# Altium PCB AtMega8-32 Programming Board.PcbDoc
Units mm, origin at the board's own origin, x right, y up, seen from the top; angles counter-clockwise.
Board outline 152.4 x 101.6 mm, 2 copper layers (Top Layer, Bottom Layer); 25 components, 37 nets, 188 pads, 0 vias.
Unrouted connection lines stored in the file: 34.
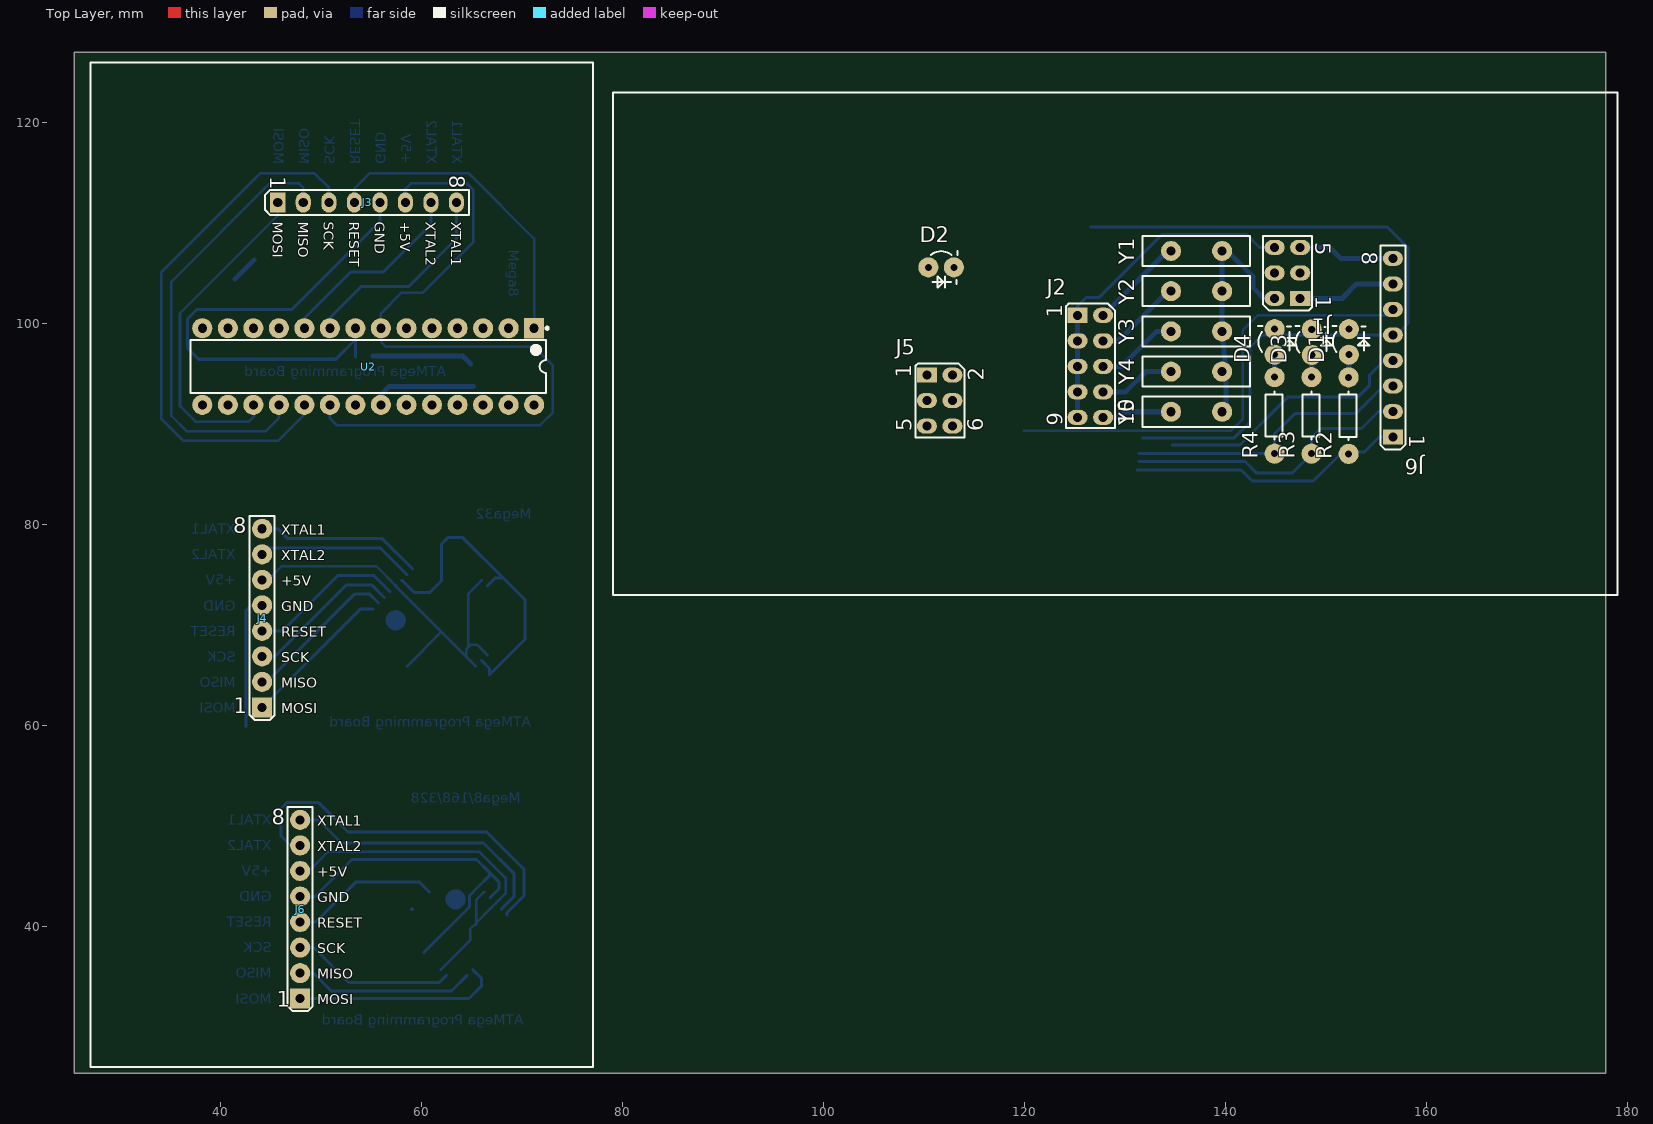
[diagram p0: Top Layer view]
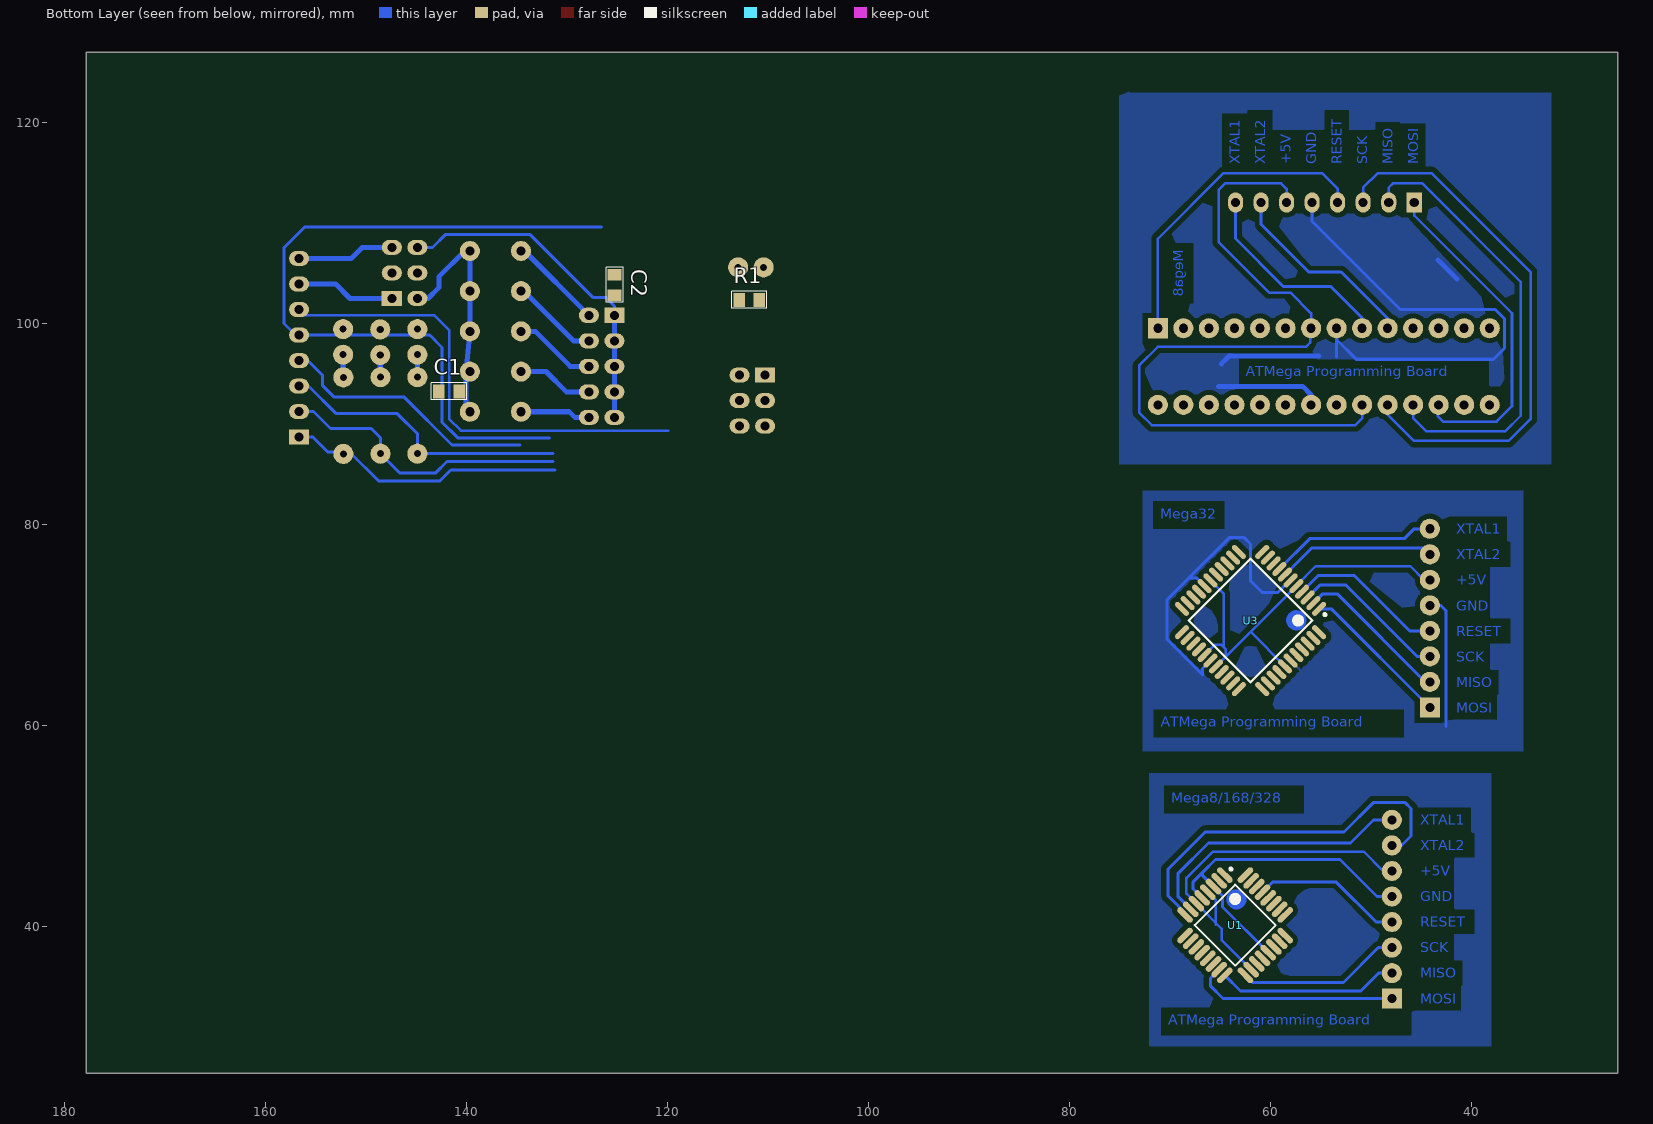
[diagram p1: Bottom Layer view, seen from below]
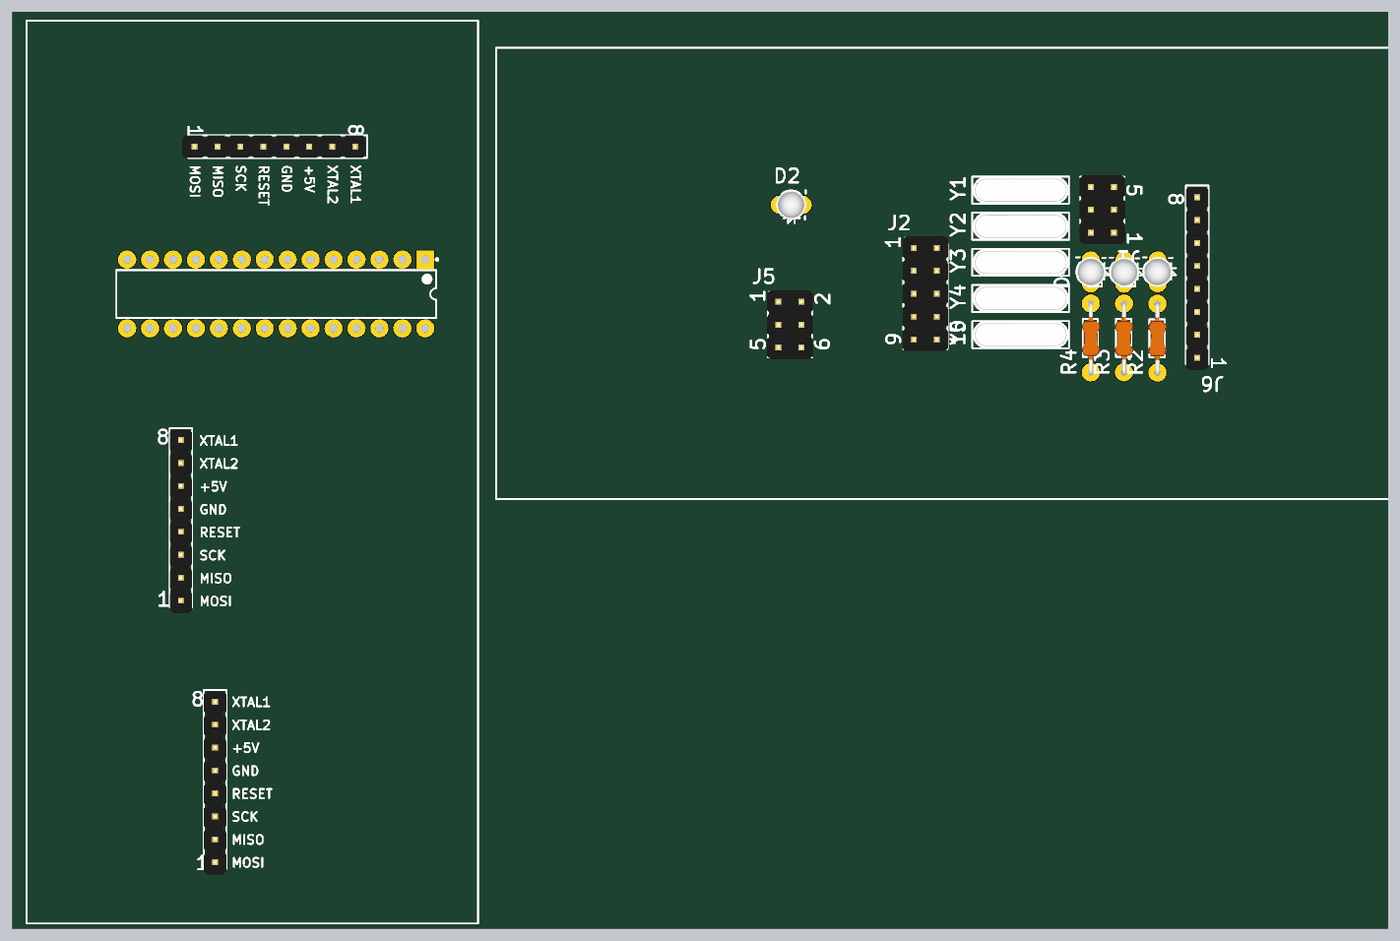
[diagram p2: 3D render of the assembled board from above, using the file's embedded part models]
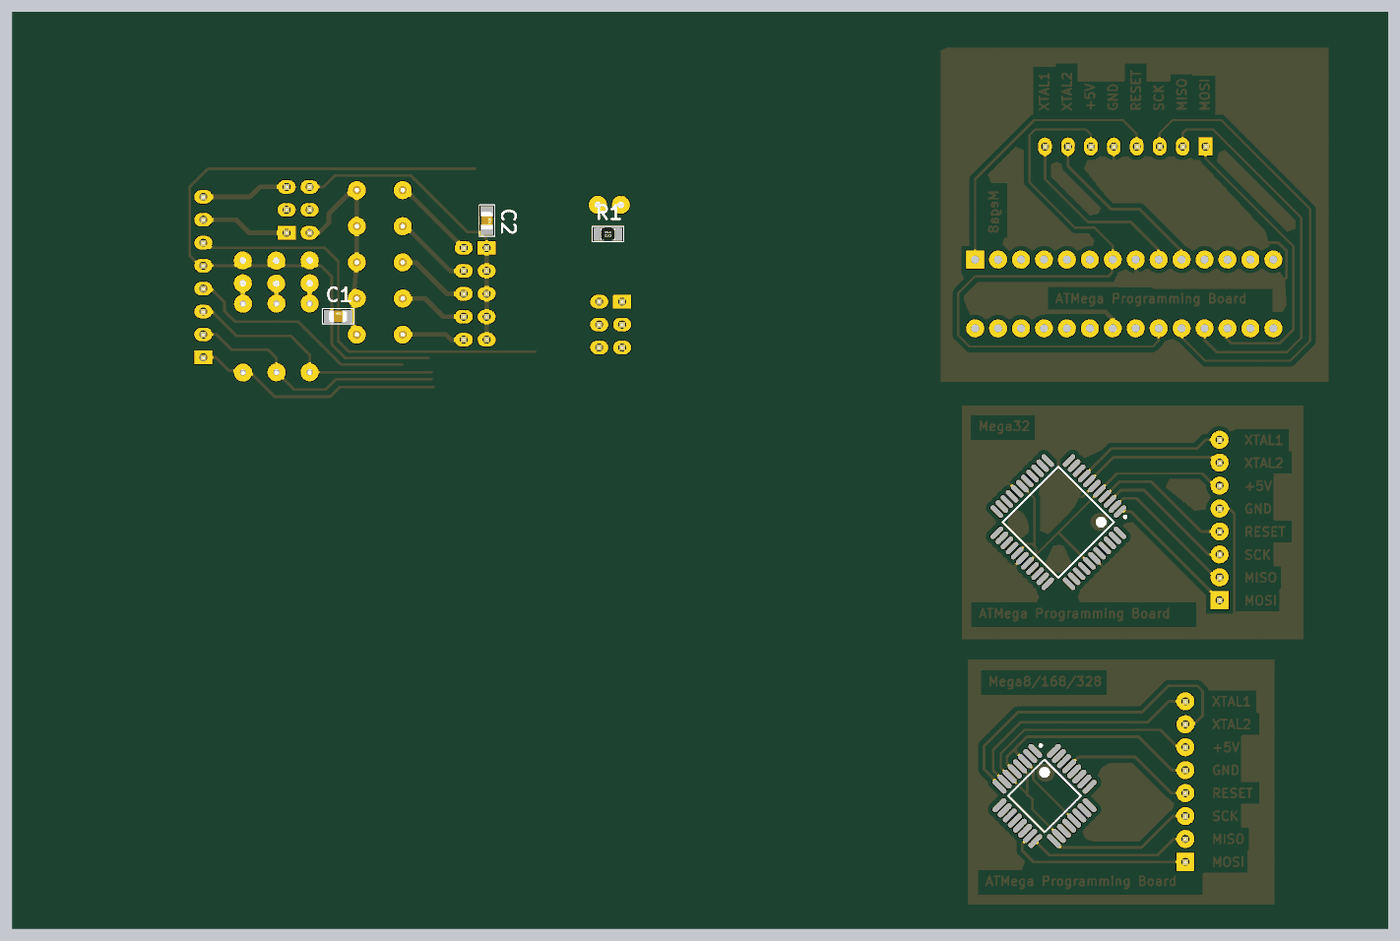
[diagram p3: 3D render of the assembled board from below, using the file's embedded part models]

## Layer stack, top to bottom
Top Solder: solder mask 0.0102, Solder Resist, Dk 3.5
Top Layer: signal copper 0.0356
Dielectric 1: dielectric 0.32, FR-4, Dk 4.8
Bottom Layer: signal copper 0.0356
Bottom Solder: solder mask 0.0102, Solder Resist, Dk 3.5

## Board outline
25.4,25.4 177.8,25.4 177.8,127 25.4,127

## Design rules (kind name [scope] priority, off if disabled: settings)
Clearance PolgonClearence [InPolygon] p1: gap=0.5
Clearance [All] p2: gap=0.2
PlaneConnect [All] p1: planeconnectstyle=Relief reliefexpansion=0.508 reliefentries=4 reliefconductorwidth=5 reliefairgap=0.5
PolygonConnect [All] p1: connectstyle=Relief reliefconductorwidth=0.3 reliefentries=4 polygonreliefangle="90 Angle" airgapwidth=0.5
RoutingVias [All] p1: holewidth=0.711 width=1.27 viastyle="Through Hole" minholewidth=0.711 minwidth=1.27 maxholewidth=0.711 maxwidth=1.27
SolderMaskExpansion [All] p1: expansion=0.102
Width [All] p1: maxlimit=1 minlimit=0.2 preferedwidth=0.3
28 further rules are at their usual default settings.

## Components (designator, comment, footprint, x,y, rotation, side; value= is the part's Value field where it differs from the comment)
C1 "22pF" "SMD 0805 (2012)" 142.725,93.225 r180 bottom
C2 "22pF" "SMD 0805 (2012)" 125.25,104.875 r270 bottom
D1 "FYL-3014GD" "LED Round 3mm Green" 152.25,96.9 r90 top
D2 "FYL-3014GD" "LED Round 3mm Green" 110.4,105.6 r0 top
D3 "FYL-3014GD" "LED Round 3mm Green" 148.55,96.875 r90 top
D4 "FYL-3014GD" "LED Round 3mm Green" 144.85,96.9 r90 top
J1 "jumper" "LINE 2.54 x 6D (2 x 3)" 147.4,102.5 r180 top
J2 "XTAL Connector" "LINE 2.54 x 10D (2 x 5)" 125.25,100.825 r0 top
J3 "PLS-8" "Line 2.54 x 8"#1 45.65,112.05 r90 top
J4 "PLS-8" "Line 2.54 x 8"#2 44.094,61.8 r180 top
J5 "ISP6" "LINE 2.54 x 6D (2 x 3)" 110.25,94.875 r0 top
J6 "PLS-8" "Line 2.54 x 8"#1 156.625,88.7 r180 top
J6 "PLS-8" "Line 2.54 x 8"#2 47.875,32.825 r180 top
R1 "2.2k Om" "SMD 0805 (2012)" 112.85,102.325 r180 bottom
R2 "2.2k Om" "Res p7.62 (4p) 0.25w" 152.225,87.025 r90 top
R3 "2.2k Om" "Res p7.62 (4p) 0.25w" 148.525,87.05 r90 top
R4 "2.2k Om" "Res p7.62 (4p) 0.25w" 144.85,87.05 r90 top
U1 "ATmega8A-AU" 32A_M 63.475,40.125 r225 bottom
U2 "ATmega8A-PU" 28P3 54.65,95.725 r270 top
U3 "ATmega32A-AU" 44A_N 61.944,70.45 r315 bottom
Y1 "8 MHz" "XTAL - 2" 139.625,107.225 r180 top
Y2 "12 MHz" "XTAL - 2" 139.625,103.225 r180 top
Y3 "16 MHz" "XTAL - 2" 139.625,99.225 r180 top
Y4 "12 MHz" "XTAL - 2" 139.625,95.225 r180 top
Y5 "12 MHz" "XTAL - 2" 139.625,91.225 r180 top

## Footprints (in the part's own frame and the unit in brackets; to place one, negate y for a bottom-side part, rotate by r counter-clockwise, add the part's x,y. Pads: shape width x height; smd on the part's side, far side on the other; paste and mask are expansions set on the pad)
28P3 [mm] "DIP, 28-Leads, Row Spacing 7.62mm, Pitch 2.54mm, Body 34.67x7.3mm"
  rect 2x2 hole 0.9: 1(-3.81,16.51)
  round 2 hole 0.9: 2(-3.81,13.97) 3(-3.81,11.43) 4(-3.81,8.89) 5(-3.81,6.35) 6(-3.81,3.81) 7(-3.81,1.27) 8(-3.81,-1.27) 9(-3.81,-3.81) 10(-3.81,-6.35) 11(-3.81,-8.89) 12(-3.81,-11.43) 13(-3.81,-13.97) 14(-3.81,-16.51) 15(3.81,-16.51) 16(3.81,-13.97) 17(3.81,-11.43) 18(3.81,-8.89) 19(3.81,-6.35) 20(3.81,-3.81) 21(3.81,-1.27) 22(3.81,1.27) 23(3.81,3.81) 24(3.81,6.35) 25(3.81,8.89) 26(3.81,11.43) 27(3.81,13.97) 28(3.81,16.51)
  silkscreen extent -3.93,-17.7 2.65,17.94, body extent -3.6,-17.65 3.6,17.65, height 4.58
32A_M [mm] "Thin QFP, 32-Leads, Body 7x7mm, Pitch 0.8mm, IPC Low Density"
  oval 1.95x0.6 smd: 1(-4.25,2.8) 2(-4.25,2) 3(-4.25,1.2) 4(-4.25,0.4) 5(-4.25,-0.4) 6(-4.25,-1.2) 7(-4.25,-2) 8(-4.25,-2.8) 17(4.25,-2.8) 18(4.25,-2) 19(4.25,-1.2) 20(4.25,-0.4) 21(4.25,0.4) 22(4.25,1.2) 23(4.25,2) 24(4.25,2.8)
  oval 0.6x1.95 smd: 9(-2.8,-4.25) 10(-2,-4.25) 11(-1.2,-4.25) 12(-0.4,-4.25) 13(0.4,-4.25) 14(1.2,-4.25) 15(2,-4.25) 16(2.8,-4.25) 25(2.8,4.25) 26(2,4.25) 27(1.2,4.25) 28(0.4,4.25) 29(-0.4,4.25) 30(-1.2,4.25) 31(-2,4.25) 32(-2.8,4.25)
  silkscreen extent -4.37,-2.85 2.85,3.77, body extent -3.5,-3.5 3.5,3.5, height 1.2
44A_N [mm] "Thin QFP, 44-Leads, Body 10x10mm, Pitch 0.8mm, IPC Medium Density"
  oval 1.75x0.55 smd: 1(-5.65,4) 2(-5.65,3.2) 3(-5.65,2.4) 4(-5.65,1.6) 5(-5.65,0.8) 6(-5.65,0) 7(-5.65,-0.8) 8(-5.65,-1.6) 9(-5.65,-2.4) 10(-5.65,-3.2) 11(-5.65,-4) 23(5.65,-4) 24(5.65,-3.2) 25(5.65,-2.4) 26(5.65,-1.6) 27(5.65,-0.8) 28(5.65,0) 29(5.65,0.8) 30(5.65,1.6) 31(5.65,2.4) 32(5.65,3.2) 33(5.65,4)
  oval 0.55x1.75 smd: 12(-4,-5.65) 13(-3.2,-5.65) 14(-2.4,-5.65) 15(-1.6,-5.65) 16(-0.8,-5.65) 17(0,-5.65) 18(0.8,-5.65) 19(1.6,-5.65) 20(2.4,-5.65) 21(3.2,-5.65) 22(4,-5.65) 34(4,5.65) 35(3.2,5.65) 36(2.4,5.65) 37(1.6,5.65) 38(0.8,5.65) 39(0,5.65) 40(-0.8,5.65) 41(-1.6,5.65) 42(-2.4,5.65) 43(-3.2,5.65) 44(-4,5.65)
  silkscreen extent -5.77,-4.35 4.35,4.95, body extent -5,-5 5,5, height 1.2
"LED Round 3mm Green" [mm]
  round 2 hole 0.7: A(0,0) K(2.54,0)
  silkscreen extent 0.25,-2.03 2.88,1.63, body extent -0.39,-1.65 2.91,1.64, height 5.51
"LINE 2.54 x 6D (2 x 3)" [mm]
  rect 2x1.5 hole 0.9: 1(0,0)
  oval 2x1.5 hole 0.9: 2(2.54,0) 3(0,-2.54) 4(2.54,-2.54) 5(0,-5.08) 6(2.54,-5.08)
  silkscreen extent -1.15,-6.2 3.72,1.17, body extent -1.27,-6.36 3.81,1.26, height 8.5
"Line 2.54 x 8"#1 [mm]
  rect 2x1.5 hole 0.9: 1(0,0)
  oval 2x1.5 hole 0.9: 2(0,-2.54) 3(0,-5.08) 4(0,-7.62) 5(0,-10.16) 6(0,-12.7) 7(0,-15.24) 8(0,-17.78)
  silkscreen extent -1.25,-19.05 1.25,1.25, body extent -1.25,-18.91 1.25,1.41, height 8.4
"Line 2.54 x 8"#2 [mm]
  rect 2x2 hole 0.9: 1(0,0)
  round 2 hole 0.9: 2(0,-2.54) 3(0,-5.08) 4(0,-7.62) 5(0,-10.16) 6(0,-12.7) 7(0,-15.24) 8(0,-17.78)
  silkscreen extent -1.25,-19.05 1.25,1.25, body extent -1.25,-18.91 1.25,1.41, height 8.4
"LINE 2.54 x 10D (2 x 5)" [mm]
  rect 2x1.5 hole 0.9: 1(0,0)
  oval 2x1.5 hole 0.9: 2(2.54,0) 3(0,-2.54) 4(2.54,-2.54) 5(0,-5.08) 6(2.54,-5.08) 7(0,-7.62) 8(2.54,-7.62) 9(0,-10.16) 10(2.54,-10.16)
  silkscreen extent -1.15,-11.2 3.72,1.17, body extent -1.26,-11.42 3.82,1.28, height 8.5
"Res p7.62 (4p) 0.25w" [mm] "L p7.62; horisontal"
  round 2 hole 0.7: 1(0,0) 2(7.62,0)
  silkscreen extent 1.4,-0.8 6.2,0.9, body extent -0.3,-1 7.8,1, height 2.1
"SMD 0805 (2012)" [mil]
  rect 45x55 smd: 1(0.35,0.98) 2(80.35,0.98)
  silkscreen extent -29,-32 109,34, body extent 1,-24 80,26, height 31
"XTAL - 2" [mm]
  round 2 hole 0.9: 1(0,0) 2(5.08,0)
  silkscreen extent -2.8,-1.5 7.9,1.5, body extent -2.79,-1.52 7.87,1.52, height 3.09

## Part data
C1 C2: library part "Cap SMD 0402-1812", "Capacitor"
D1 D2 D3 D4: library part "Led Round 3mm Green", "2.1v 10mA, 15-30mCd"
J1 J5: library part "PLD-6 (2 x 3)", "Vert, Dbl line, Male"
J2: library part "PLD-10 (2 x 5)", "Vert, Dbl line, Male"
J3 J4 J6 J6: "Vert, Sgl line, Male"
R1 R2 R3 R4: library part "Res All Types"
U1: "8-bit AVR Microcontroller, 8KB Flash, 512 Bytes EEPROM, 1KB SRAM, 32-pin TQFP, Industrial Grade (-40°C to 85°C)"
U2: "8-bit AVR Microcontroller, 8KB Flash, 512 Bytes EEPROM, 1KB SRAM, 28-pin PDIP, Industrial Grade (-40°C to 85°C)"
U3: "8-bit AVR Microcontroller, 32KB Flash, 1KB EEPROM, 2KB SRAM, 44-pin TQFP, Industrial Grade (-40°C to 85°C)"
Y1 Y2 Y3 Y4 Y5: library part XTAL, "Crystal Oscillator"

## Nets (pads, with @x,y where several pads share a name; then routed paths per layer and width w, separated by ;. In a path a pad name is that pad's centre, name@x,y a point inside that pad or via, vN(x,y) a via of type N, cw(c..) or ccw(c..) an arc to the next point about the centre after c; other vN are vias at no path point)
+5V: J3.6 J4.6 J5.2 J6.6 R1.1 U1.4 U1.6 U1.18 U2.7 U2.20 U3.5 U3.17 U3.27 U3.29 U3.38 | length 201.9
  Bottom Layer w0.254: J4.6 44.694,74.5 46.044,75.85 55.469,75.85 57.383,73.936 U3.5 64.394,66.869 ; J6.6@47.875,45.525 48.75,45.525 50.675,47.45 65.7,47.45 68.325,44.825 68.325,43.278 U1.6 64.822,39.775 64.822,38.644 U1.18 ; U2.20 50.84,90.56 51.5,89.9 71.775,89.9 73.025,91.15 73.025,95.825 71.175,97.675 56.425,97.675 56,98.1 56,99.455 U2.7 55.92,101.02 57.975,103.075 60.1,103.075 65.125,108.1 65.125,113.3 64.475,113.95 58.9,113.95 58.35,113.4 J3.6 ; U3.38 61.913,69.287 ; 64.594,67.8 64.594,73.1 U3.17 ; U3.29 64.394,66.869 ; 65.4,40.191 65.4,42.616 U1.4 ; U3.27 65.475,68.05 64.869,68.05 64.394,67.575 64.394,66.869 ; 119.875,89.35 140.525,89.35 141.7,90.525 141.7,99.35 143.2,100.85 156.075,100.85 J6.6@156.625,101.4
AREF: U1.20
GND: C1.1 C2.1 D1.K D2.K D3.K D4.K J3.5 J4.5 J5.6 J6.5 U1.3 U1.5 U1.21 U2.8 U2.22 U3.6 U3.18 U3.28 U3.39 | length 228.2
  Bottom Layer w0.3: 42.469,59.9 42.469,71.4 43.029,71.96 ; 43.009,71.96 43.029,71.96 ; J4.5 43.029,71.96 ; J6.5@47.875,42.985 49.36,42.985 53.05,46.675 65.425,46.675 66.7,45.4 ; 53.38,96.695 53.38,98.405 ; U2.8 53.38,98.405 ; J3.5 55.81,110.16 47.05,101.4 37.6,101.4 36.675,100.475 36.675,97.55 37.775,96.45 51.425,96.45 53.38,98.405 ; U2.22 55.92,92.92 ; U3.6 58.024,74.445 59.219,73.25 60.794,73.25 61.944,74.4 61.944,78.075 62.569,78.7 64.069,78.7 68.069,74.7 ; U1.21 64.725,41.941 64.725,43.072 U1.3 65.632,43.982 66.7,45.05 66.7,45.4 ; U3.28 66.719,65.675 66.719,65.05 70.269,68.6 70.269,72.5 68.069,74.7 ; U3.18 67.325,74.7 68.069,74.7 ; U1.5 67.65,43.734 67.65,44.45 66.7,45.4 ; 126.525,109.6 156.075,109.6 158.125,107.55 158.125,100 156.985,98.86 156.625,98.86 143.635,98.86 142.4,97.625 142.4,90.175 140.85,88.625 131.723,88.625
  Bottom Layer w0.5: 41.375,104.425 43.3,106.35 ; 55.125,96.775 64.075,96.775 64.85,96 ; 55.92,92.92 56.75,93.75 65.15,93.75
MISO: J3.2 J4.2 J5.1 J6.2 R3.1 U1.16 U2.18 U3.2 | length 108.1
  Bottom Layer w0.254: U2.18 45.76,90.61 44.425,89.275 36.604,89.275 35.05,90.829 35.05,104.15 44.85,113.95 47.775,113.95 48.19,113.535 J3.2
  Bottom Layer w0.3: J4.2@44.327,64.107 53.319,73.1 54.769,73.1 U3.2 ; J6.2@47.875,35.365 49.185,35.365 50.975,33.575 62.935,33.575 U1.16 ; 131.35,86.275 141.9,86.275 143.025,85.15 146.625,85.15 R3.1 148.525,88.625 149.45,89.55 153.5,89.55 155.19,91.24 J6.2@156.625,91.24
MOSI: J3.1 J4.1 J5.4 J6.1 R2.1 U1.15 U2.17 U3.1 | length 97.1
  Bottom Layer w0.254: U2.17 43.325,91.81 43.325,90.8 42.775,90.25 37.45,90.25 35.925,91.775 35.925,101.025 45.65,110.75 J3.1
  Bottom Layer w0.3: J4.1 53.911,71.617 U3.1 ; J6.1@47.875,32.825 64.675,32.825 65.95,34.1 65.95,34.822 U1.15 ; 131.175,85.425 141.525,85.425 142.6,84.35 148.725,84.35 151.4,87.025 R2.1 152.425,87.225 153.775,87.225 155.25,88.7 J6.1@156.625,88.7
NetC1_2: C1.2 J1.2 Y1.1 Y2.1 Y3.1 Y4.1 Y5.1 | length 23.8
  Bottom Layer w0.3: 143.8,102.5 J1.2
  Bottom Layer w0.5: Y5.1@140,91.225 140,95.225 Y3.1 Y2.1 Y1.1 140.15,107.225 142.725,104.65 142.725,103.575 143.8,102.5
NetC2_2: C2.2 J1.6 J2.1 J2.3 J2.5 J2.7 J2.9 | length 34.2
  Bottom Layer w0.3: J2.1 125.25,101.75 126.075,102.575 127.35,102.575 133.625,108.85 142.075,108.85 143.345,107.58 J1.6
  Bottom Layer w0.5: J2.9 J2.7 J2.5 J2.3 J2.1
NetD1_A: D1.A R2.2 | length 2.3
  Bottom Layer w0.5: R2.2 152.25,94.67 D1.A
NetD2_A: D2.A R1.2
NetD3_A: D3.A R3.2 | length 2.2
  Bottom Layer w0.5: R3.2@148.55,94.695 D3.A
NetD4_A: D4.A R4.2 | length 2.2
  Bottom Layer w0.5: R4.2 D4.A
NetJ2_2: J2.2 Y1.2 | length 9.4
  Bottom Layer w0.5: J2.2 134.19,107.225 Y1.2
NetJ2_4: J2.4 Y2.2 | length 8.8
  Bottom Layer w0.5: J2.4 129.31,98.285 134.25,103.225 Y2.2
NetJ2_6: J2.6 Y3.2 | length 8.2
  Bottom Layer w0.5: J2.6 129.645,95.745 133.125,99.225 Y3.2
NetJ2_8: J2.8 Y4.2 | length 7.6
  Bottom Layer w0.5: J2.8 130.03,93.205 132.05,95.225 Y4.2
NetJ2_10: J2.10 Y5.2 | length 7
  Bottom Layer w0.5: J2.10 129.19,90.665 129.75,91.225 Y5.2
PB0: U1.12
PB1: U1.13
PB2: U1.14
PB6: J1.5 J3.8 J4.8 J6.8 U1.7 U2.9 U3.8 | length 74.4
  Bottom Layer w0.3: J4.8 45.664,79.58 46.644,78.6 56.057,78.6 U3.8 ; J6.8@47.875,50.605 49.695,50.605 52,48.3 66.125,48.3 69.175,45.25 69.175,42.997 U1.7 ; U2.9 50.84,100.59 53.95,103.7 58.675,103.7 63.43,108.455 J3.8
  Bottom Layer w0.5: J1.5 150.345,107.58 151.445,106.48 J6.8@156.625,106.48
PB7: J1.1 J3.7 J4.7 J6.7 U1.8 U2.10 U3.7 | length 82.7
  Bottom Layer w0.3: J4.7 44.704,77.65 55.875,77.65 U3.7 ; J6.7@47.875,48.065 46.91,48.065 45.975,49 45.975,51.75 46.55,52.325 49.725,52.325 52.65,49.4 66.45,49.4 70.175,45.675 70.175,43.077 68.46,41.362 U1.8 ; U2.10 48.3,100.5 52.925,105.125 56.15,105.125 60.89,109.865 J3.7
  Bottom Layer w0.5: J1.1 151.55,102.5 152.99,103.94 J6.7@156.625,103.94
PC0: U1.23
PC1: U1.24
PC2: U1.25
PC3: U1.26 | length 0.1
  Bottom Layer w0.3: U1.26@58.984,41.716 U1.26
PC4: U1.27
PC5: U1.28
PD0: U1.30
PD1: U1.31
PD2: U1.32
PD3: U1.1
PD4: U1.2
PD5: U1.9
PD6: U1.10
PD7: U1.11
RESET: J3.4 J4.4 J5.5 J6.4 U1.29 U2.1 U3.4 | length 88.2
  Bottom Layer w0.254: J3.4 53.27,113.42 54.825,114.975 64.625,114.975 71.16,108.44 U2.1
  Bottom Layer w0.3: J4.4 46.114,69.42 51.644,74.95 55.181,74.95 U3.4 ; J6.4@47.875,40.445 49.445,40.445 53.45,44.45 59.716,44.45 U1.29 ; 134.625,87.925 141.4,87.925 146.15,92.675 153.125,92.675 154.275,93.825 154.275,94.825 155.77,96.32 J6.4@156.625,96.32
SCK: J3.3 J4.3 J5.3 J6.3 R4.1 U1.17 U2.19 U3.3 | length 115.8
  Bottom Layer w0.254: U2.19 48.3,90.95 45.675,88.325 36.25,88.325 34.075,90.5 34.075,105.125 43.925,114.975 49.275,114.975 50.73,113.52 J3.3
  Bottom Layer w0.3: J4.3 45.381,66.88 52.501,74 55,74 U3.3 ; J6.3@47.875,37.905 49.22,37.905 52.7,34.425 61.735,34.425 U1.17 ; 131.375,87.05 R4.1@144.825,87.05 ; R4.1 R4.1@144.825,87.05 ; J6.3@156.625,93.78 155.68,93.78 152.975,91.075 146.9,91.075 144.825,89 R4.1@144.825,87.05
pads on no net: J1.3 J1.4 U1.19 U1.22 U2.2 U2.3 U2.4 U2.5 U2.6 U2.11 U2.12 U2.13 U2.14 U2.15 U2.16 U2.21 U2.23 U2.24 U2.25 U2.26 U2.27 U2.28 U3.9 U3.10 U3.11 U3.12 U3.13 U3.14 U3.15 U3.16 U3.19 U3.20 U3.21 U3.22 U3.23 U3.24 U3.25 U3.26 U3.30 U3.31 U3.32 U3.33 U3.34 U3.35 U3.36 U3.37 U3.40 U3.41 U3.42 U3.43 U3.44
copper on no net: | length 6.3
  Bottom Layer w1: 57.894,70.475 ccw(c57.394,70.475) 57.894,70.475 ; 63.85,42.7 ccw(c63.35,42.7) 63.85,42.7

## Polygon pours and split planes (outlines as drawn)
GND on Bottom Layer "Top Layer-No Net" (solid, pour order 5): 32,86 75,86 75,124 73.976,122.973 32,122.973
no net on Bottom Layer "Top Layer-No Net" (solid, pour order 3): 72,28.075 38,28.075 38,55.25 72,55.25
GND on Bottom Layer "Top Layer-No Net" (solid): 72.65,83.375 34.794,83.375 34.794,57.45 72.65,57.45

## Other copper
Bottom Layer:
  text "MOSI" at 45.26,115.86 h1 r270
  text "MISO" at 47.8,115.86 h1 r270
  text "SCK" at 50.34,115.86 h1 r270
  text "RESET" at 52.88,115.86 h1 r270
  text "GND" at 55.42,115.86 h1 r270
  text "+5V" at 57.96,115.86 h1 r270
  text "XTAL2" at 60.5,115.86 h1 r270
  text "XTAL1" at 63.04,115.86 h1 r270
  text "Mega8" at 68.625,107.325 h1 r270
  text "ATMega Programming Board" at 62.4,94.75 h1
  text "Mega32" at 70.925,80.6 h1
  text "XTAL1" at 41.484,79.065 h1
  text "XTAL2" at 41.484,76.525 h1
  text "+5V" at 41.484,73.985 h1
  text "GND" at 41.484,71.445 h1
  text "RESET" at 41.484,68.905 h1
  text "SCK" at 41.484,66.365 h1
  text "MISO" at 41.484,63.825 h1
  text "MOSI" at 41.484,61.285 h1
  text "ATMega Programming Board" at 70.875,59.875 h1
  text "Mega8/168/328" at 69.825,52.325 h1
  text "XTAL1" at 45.065,50.115 h1
  text "XTAL2" at 45.065,47.575 h1
  text "+5V" at 45.065,45.035 h1
  text "GND" at 45.065,42.495 h1
  text "RESET" at 45.065,39.955 h1
  text "SCK" at 45.065,37.415 h1
  text "MISO" at 45.065,34.875 h1
  text "MOSI" at 45.065,32.335 h1
  text "ATMega Programming Board" at 70.15,30.225 h1

## Silkscreen, mask and mechanical layers (free items; w line width, h text height)
Top Overlay:
  lines w0.2: 27,26 27,126 77,126 77,76 77,26 27,26 ; 79,73 179,73 179,123 129,123 79,123 79,73
  text "MOSI" at 45.16,110.135 h1 r270
  text "MISO" at 47.7,110.135 h1 r270
  text "SCK" at 50.24,110.135 h1 r270
  text "RESET" at 52.78,110.135 h1 r270
  text "GND" at 55.32,110.135 h1 r270
  text "+5V" at 57.86,110.135 h1 r270
  text "XTAL2" at 60.4,110.135 h1 r270
  text "XTAL1" at 62.94,110.135 h1 r270
  text "XTAL1" at 46.009,78.99 h1
  text "XTAL2" at 46.009,76.45 h1
  text "+5V" at 46.009,73.91 h1
  text "GND" at 46.009,71.37 h1
  text "RESET" at 46.009,68.83 h1
  text "SCK" at 46.009,66.29 h1
  text "MISO" at 46.009,63.75 h1
  text "MOSI" at 46.009,61.21 h1
  text "XTAL1" at 49.59,50.04 h1
  text "XTAL2" at 49.59,47.5 h1
  text "+5V" at 49.59,44.96 h1
  text "GND" at 49.59,42.42 h1
  text "RESET" at 49.59,39.88 h1
  text "SCK" at 49.59,37.34 h1
  text "MISO" at 49.59,34.8 h1
  text "MOSI" at 49.59,32.26 h1

## Text inside footprints (layer, text, board x,y; h text height)
J1: Top Overlay "5" at 148.9,108.1 h1.52 r270; Top Overlay "1" at 148.95,102.75 h1.52 r270
J2: Top Overlay "10" at 130.85,89.825 h1.52 r90; Top Overlay "9" at 123.75,89.825 h1.52 r90; Top Overlay "1" at 123.7,100.575 h1.52 r90
J3: Top Overlay "8" at 62.725,114.775 h1.52 r270; Top Overlay "1" at 44.925,114.675 h1.52 r270
J4: Top Overlay "8" at 41.219,79.15 h1.52; Top Overlay "1" at 41.294,61.2 h1.52
J5: Top Overlay "6" at 115.85,89.275 h1.52 r90; Top Overlay "5" at 108.75,89.275 h1.52 r90; Top Overlay "2" at 115.9,94.3 h1.52 r90; Top Overlay "1" at 108.7,94.625 h1.52 r90
J6: Top Overlay "1" at 158.25,88.95 h1.52 r270; Top Overlay "8" at 153.525,107.125 h1.52 r270
J6: Top Overlay "8" at 45.065,50.115 h1.52; Top Overlay "1" at 45.575,32 h1.52